# EAGLE board Original (EAGLE 9.2.2)
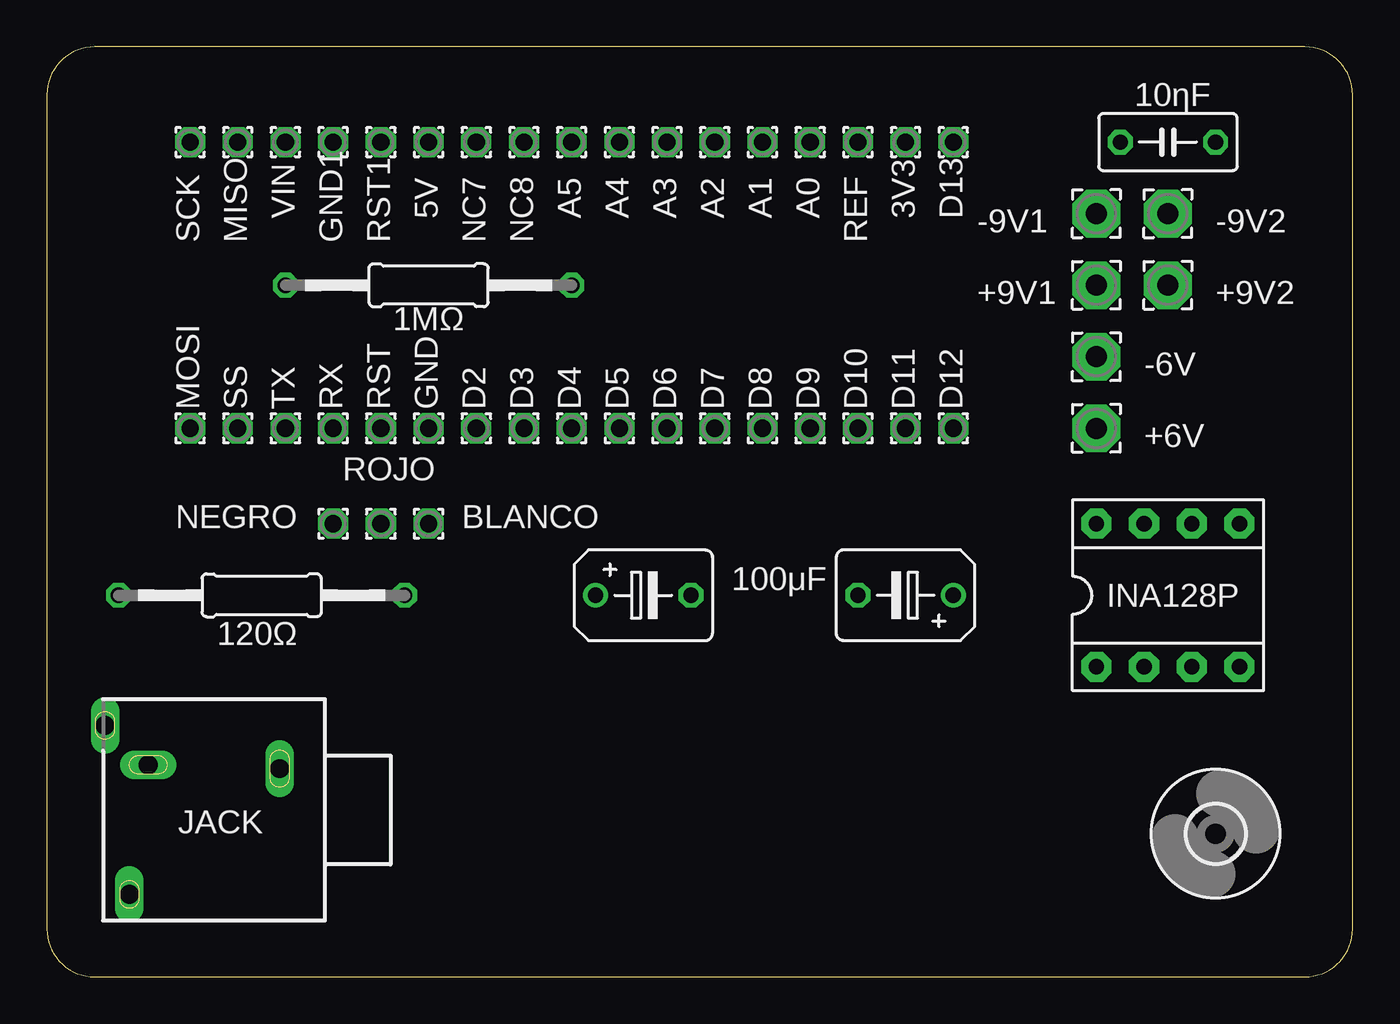
[diagram p0: board, top side]
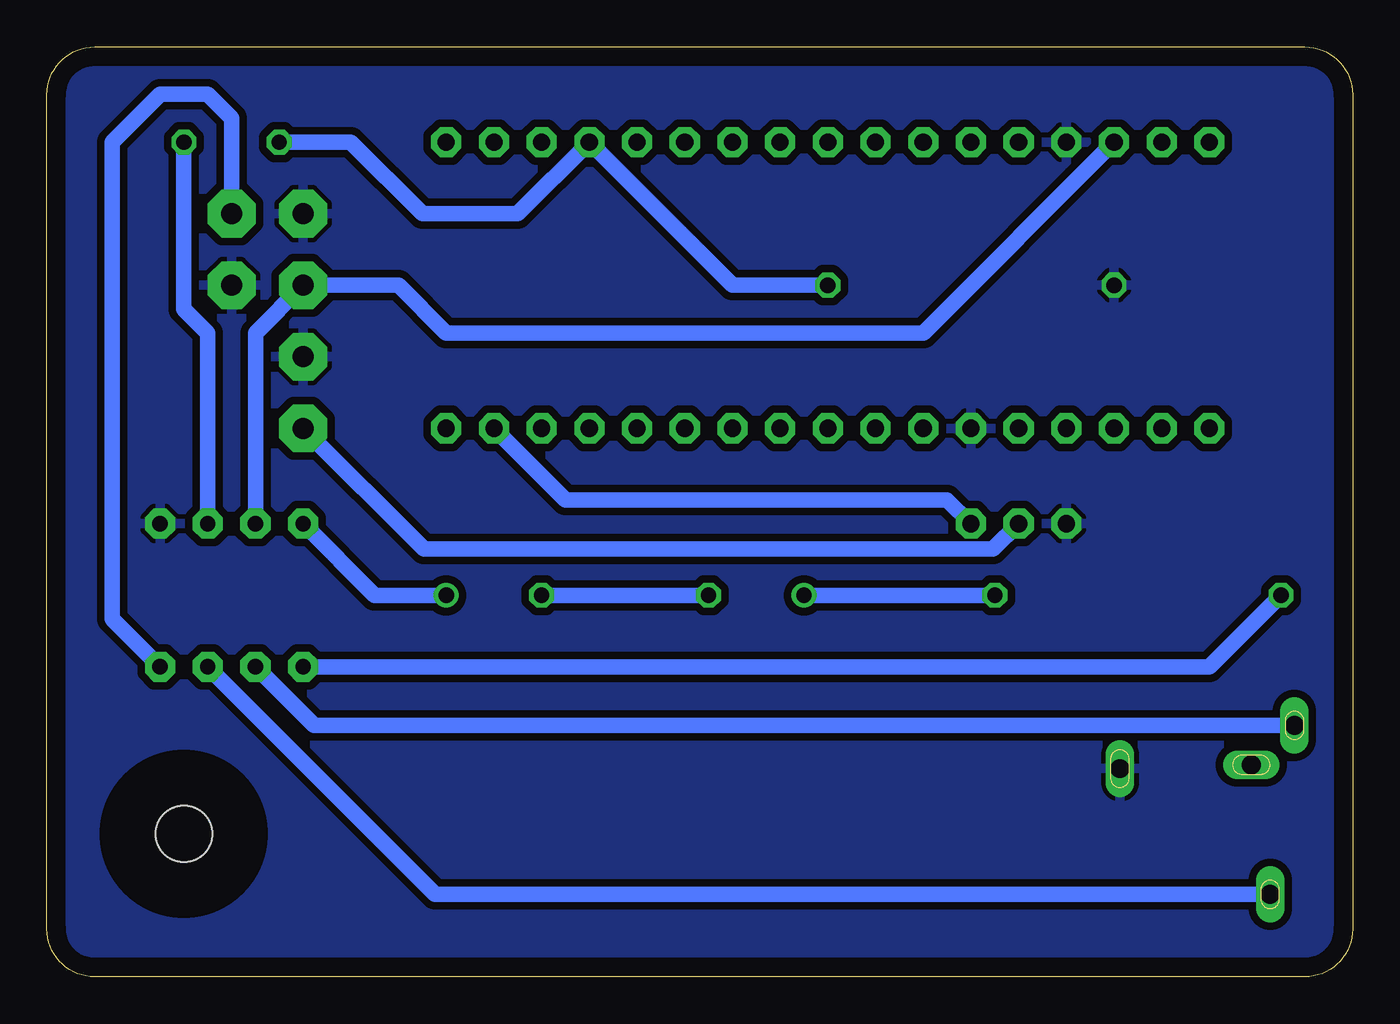
[diagram p1: board, bottom side, seen from below]

Size 69.52 x 49.52 mm. Coordinates in mm from the lower left corner, seen from the top.
Outline: 0,46.98 0,2.54 arc90 2.54,0 66.98,0 arc90 69.52,2.54 69.52,46.98 arc90 66.98,49.52 2.54,49.52 arc90 0,46.98
Copper layers (1*16): Top 0.035mm / dielectric 1.5mm / Bottom 0.035mm
Design rules "default": minimum track width 6mil, minimum drill 0.35mm, track to track 6mil, track to pad 6mil, pad to pad 6mil, via to via 6mil, smd to smd 6mil, copper to edge 40mil, drill to drill 6mil, minimum pad ring 10mil, minimum via ring 8mil, stop-mask expansion 4mil, vias tented up to drill 0mil, thermal gap 10mil

## Footprints (pad centres in the part's own frame; a part is rotated, then mirrored left to right if it is on the bottom)
0207/15 = drill 0.813 octagon: 1 -7.62,0; 2 7.62,0
1,6/0,9 = drill 0.914 pad 1.6 octagon: 1 0,0
C050-030X075 = drill 0.813 octagon: 1 -2.54,0; 2 2.54,0
B45181B = drill 0.813: + -2.54,0 | drill 0.813 octagon: - 2.54,0
2,54/1,1 = drill 1.118 pad 2.54 octagon: 1 0,0
DIL08 = drill 0.813 pad 1.6 octagon: 1 -3.81,-3.81; 2 -1.27,-3.81; 3 1.27,-3.81; 4 3.81,-3.81; 5 3.81,3.81; 6 1.27,3.81; 7 -1.27,3.81; 8 -3.81,3.81
KLBR4 = drill 1 pad 1.3 long: B -2.4,-3.5; S -2.2,3.5 | drill 1 pad 1.2 long: R -4.5,-5.8; T 4.5,-4.5
3,0 = hole 3: 0,0

## Placement (x,y rotation side)
1MΩ  1MΩ  [0207/15]  20.32,36.83 0 top
3V3  [1,6/0,9]  45.72,44.45 0 top
5V  [1,6/0,9]  20.32,44.45 0 top
10ηF  10nF  [C050-030X075]  59.69,44.45 180 top
100μF  100μF  [B45181B]  31.75,20.32 0 top
120Ω  120Ω  [0207/15]  11.43,20.32 180 top
+6V  [2,54/1,1]  55.88,29.21 0 top
+9V1  [2,54/1,1]  55.88,36.83 0 top
+9V2  [2,54/1,1]  59.69,36.83 0 top
-6V  [2,54/1,1]  55.88,33.02 0 top
-9V1  [2,54/1,1]  55.88,40.64 0 top
-9V2  [2,54/1,1]  59.69,40.64 0 top
A0  [1,6/0,9]  40.64,44.45 0 top
A1  [1,6/0,9]  38.1,44.45 0 top
A2  [1,6/0,9]  35.56,44.45 0 top
A3  [1,6/0,9]  33.02,44.45 0 top
A4  [1,6/0,9]  30.48,44.45 0 top
A5  [1,6/0,9]  27.94,44.45 0 top
BLANCO  [1,6/0,9]  20.32,24.13 0 top
C2  100μF  [B45181B]  45.72,20.32 180 top
D2  [1,6/0,9]  22.86,29.21 0 top
D3  [1,6/0,9]  25.4,29.21 0 top
D4  [1,6/0,9]  27.94,29.21 0 top
D5  [1,6/0,9]  30.48,29.21 0 top
D6  [1,6/0,9]  33.02,29.21 0 top
D7  [1,6/0,9]  35.56,29.21 0 top
D8  [1,6/0,9]  38.1,29.21 0 top
D9  [1,6/0,9]  40.64,29.21 0 top
D10  [1,6/0,9]  43.18,29.21 0 top
D11  [1,6/0,9]  45.72,29.21 0 top
D12  [1,6/0,9]  48.26,29.21 0 top
D13  [1,6/0,9]  48.26,44.45 0 top
GND  [1,6/0,9]  20.32,29.21 0 top
GND1  [1,6/0,9]  15.24,44.45 0 top
INA128P  INA128P  [DIL08]  59.69,20.32 0 top
JACK  conector  [KLBR4]  8.89,8.89 270 top
MISO  [1,6/0,9]  10.16,44.45 0 top
MOSI  [1,6/0,9]  7.62,29.21 0 top
NC7  [1,6/0,9]  22.86,44.45 0 top
NC8  [1,6/0,9]  25.4,44.45 0 top
NEGRO  [1,6/0,9]  15.24,24.13 0 top
REF  [1,6/0,9]  43.18,44.45 0 top
ROJO  [1,6/0,9]  17.78,24.13 0 top
RST  [1,6/0,9]  17.78,29.21 0 top
RST1  [1,6/0,9]  17.78,44.45 0 top
RX  [1,6/0,9]  15.24,29.21 0 top
SCK  [1,6/0,9]  7.62,44.45 0 top
SS  [1,6/0,9]  10.16,29.21 0 top
TX  [1,6/0,9]  12.7,29.21 0 top
U$2  [3,0]  62.23,7.62 0 top
VIN  [1,6/0,9]  12.7,44.45 0 top

## Library data of the parts
1MΩ 120Ω = rcl; SPICEPREFIX: R
3V3 5V +6V +9V1 +9V2 -6V -9V1 -9V2 A0 A1-A5 BLANCO D2-D13 GND GND1 MISO MOSI NC7 NC8 NEGRO REF ROJO RST RST1 RX SCK SS TX VIN = wirepad
10ηF 100μF C2 = rcl; SPICEPREFIX: C
INA128P = burr-brown; MF: TEXAS INSTRUMENTS; MPN: INA128P; OC_FARNELL: 1212410; OC_NEWARK: 74C9783
JACK = con-lumberg; MPN: KLBR 4; OC_FARNELL: 1217016; OC_NEWARK: 97K2709
U$2 = holes

## Nets
+6VCC: +6V.1 ROJO.1
+9VCC: +9V1.1 INA128P.7 VIN.1
-9VCC: -9V2.1 INA128P.4
A0: 1MΩ.2 10ηF.2 A0.1
CONTROL_SERVO: BLANCO.1 D11.1
E1: INA128P.2 JACK.R
E2: INA128P.3 JACK.T
GND: 1MΩ.1 +9V2.1 -6V.1 -9V1.1 GND1.1 GND.1 INA128P.5 JACK.S NEGRO.1
N$1: C2.+ INA128P.8
N$2: 100μF.- C2.-
N$3: 120Ω.2 INA128P.1
N$4: 100μF.+ 120Ω.1
N$5: 10ηF.1 INA128P.6

## Tracks (layer width: path | path; a pad name or v marks a point on that pad's centre or on a via)
+6VCC
  Bottom 0.813: ROJO.1 19.14,22.77 49.44,22.77 +6V.1
+9VCC
  Bottom 0.813: INA128P.7 58.42,34.29 +9V1.1 50.8,36.83 48.26,34.29 22.86,34.29 VIN.1
-9VCC
  Bottom 0.813: INA128P.4 66.04,19.05 66.04,31.75 66.04,44.45 63.5,46.99 60.96,46.99 59.69,45.72 -9V2.1
A0
  Bottom 0.813: 1MΩ.2 33.02,36.83 A0.1 44.45,40.64 49.53,40.64 53.34,44.45 10ηF.2
CONTROL_SERVO
  Bottom 0.813: BLANCO.1 21.59,25.4 41.91,25.4 D11.1
E1
  Bottom 0.813: JACK.R 55.3,13.39 INA128P.2
E2
  Bottom 0.813: JACK.T 48.84,4.39 INA128P.3
GND
  pour Bottom (isolate 0.406): -10.16,86.36 106.68,86.36 106.68,-7.62 -10.16,-7.62
N$1
  Bottom 0.813: C2.+ 52.07,20.32 INA128P.8
N$2
  Bottom 0.813: C2.- 100μF.-
N$3
  Bottom 0.813: 120Ω.2 7.62,16.51 INA128P.1
N$4
  Bottom 0.813: 100μF.+ 120Ω.1
N$5
  Bottom 0.813: 10ηF.1 62.23,35.56 60.96,34.29 INA128P.6